# Altium PCB top board (Конфликтующая копия с компьютера LAPTOP-J390UHDT 2019-03-17 (1)).PcbDoc
Units mm, origin at the board's own origin, x right, y up, seen from the top; angles counter-clockwise.
Board outline 77 x 77 mm, 2 copper layers (Top Layer, Bottom Layer); 54 components, 41 nets, 182 pads, 60 vias.
Unrouted connection lines stored in the file: 36.
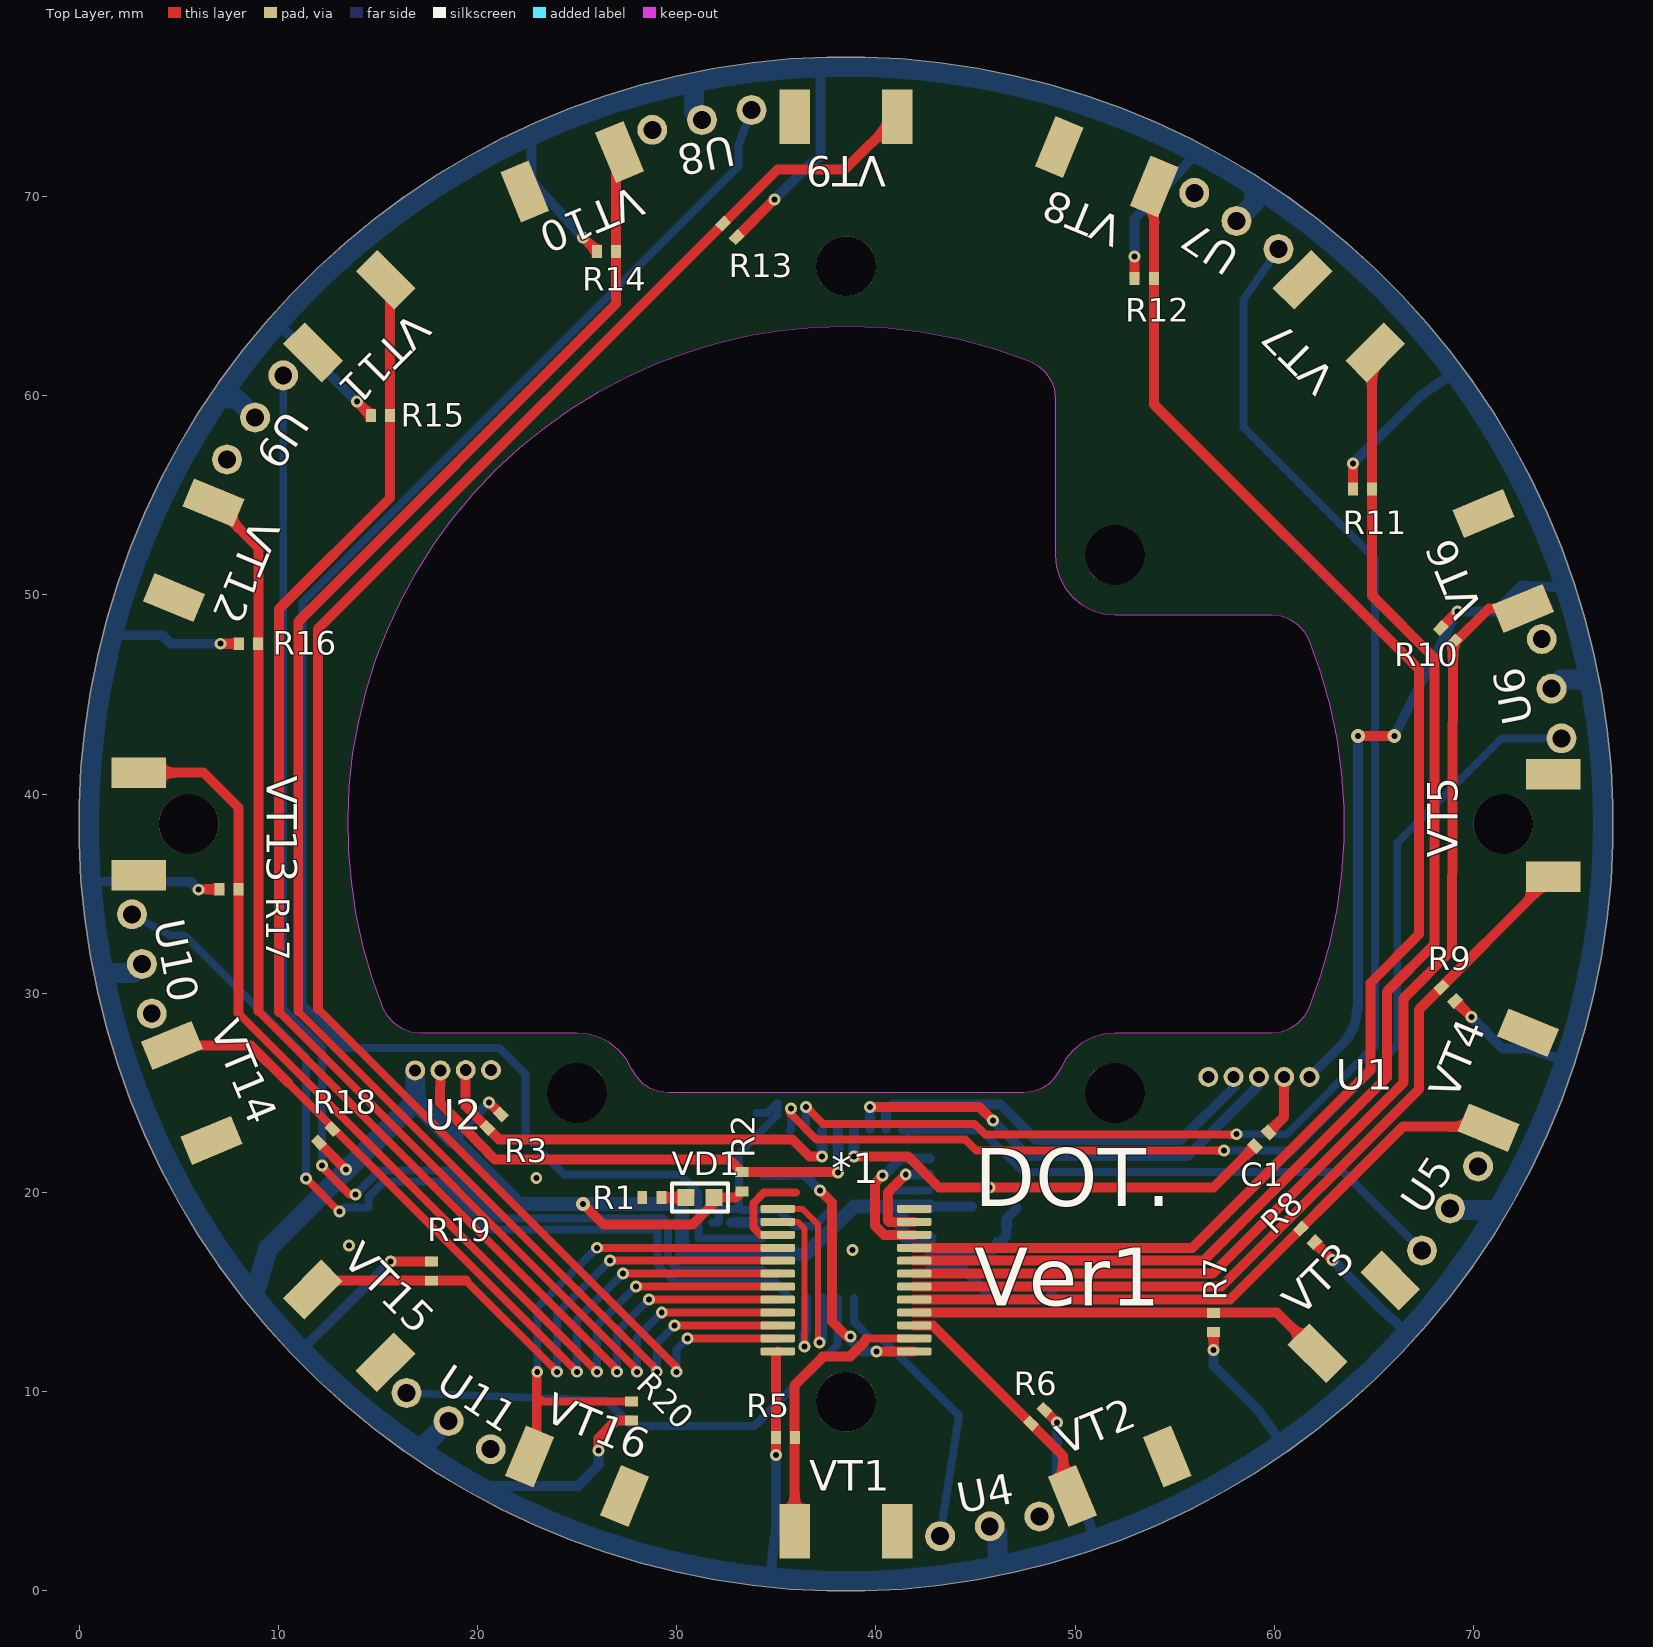
[diagram p0: Top Layer view]
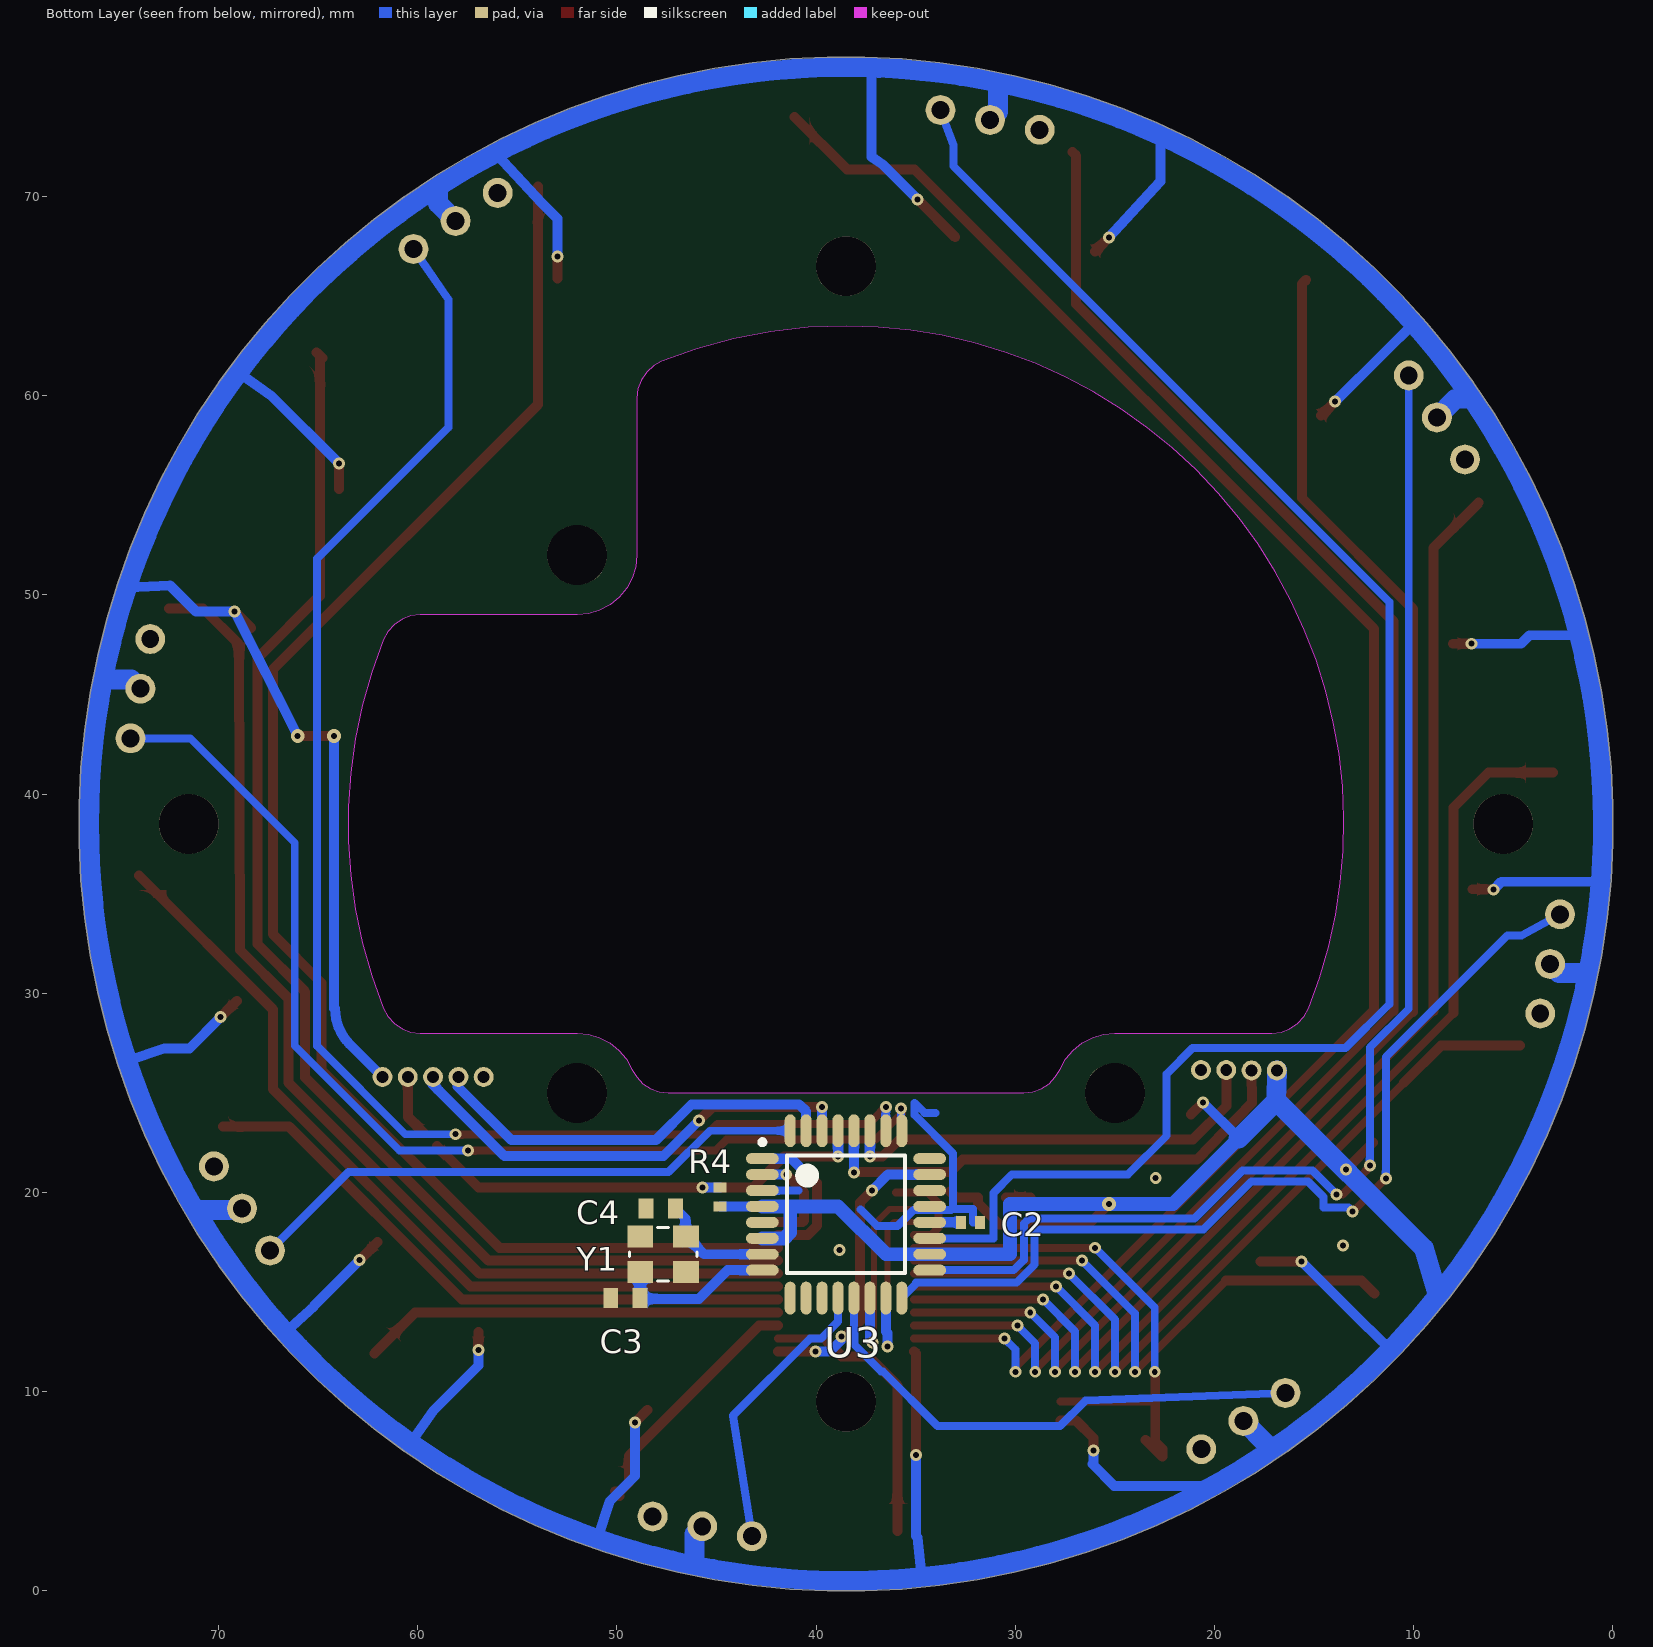
[diagram p1: Bottom Layer view, seen from below]
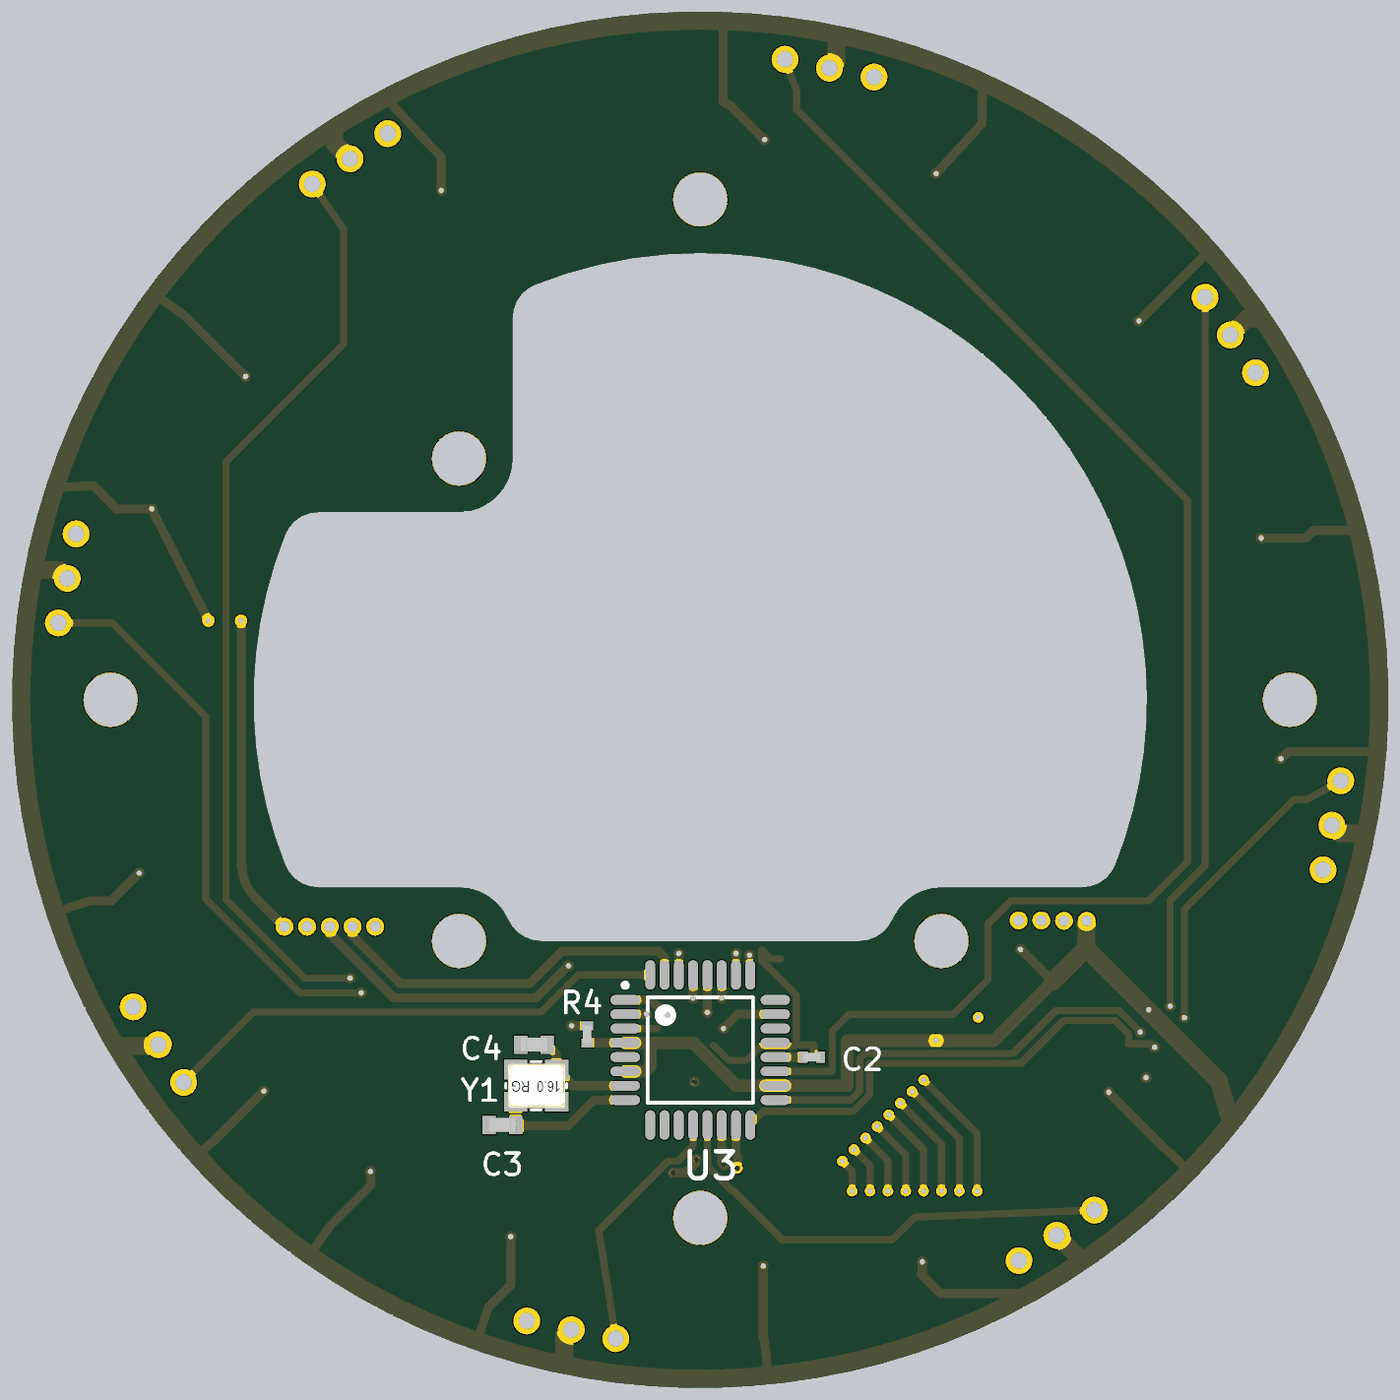
[diagram p2: 3D render of the assembled board from below, using the file's embedded part models]

## Layer stack, top to bottom
Top Solder: solder mask 0.0102, Solder Resist, Dk 3.5
Top Layer: signal copper 0.0356
Dielectric 1: dielectric 0.32, FR-4, Dk 4.8
Bottom Layer: signal copper 0.0356
Bottom Solder: solder mask 0.0102, Solder Resist, Dk 3.5

## Board outline
4.992,19.518 4.101,21.185 3.292,22.894 2.569,24.64 1.932,26.42 1.383,28.228 0.924,30.062 0.555,31.916 0.278,33.786 0.093,35.667 0,37.555 0,39.445 0.093,41.333 0.278,43.214 0.555,45.084 0.924,46.938 1.383,48.772 1.932,50.58 2.569,52.36 3.292,54.106 4.101,55.815 4.992,57.482 5.963,59.104 7.014,60.675 8.14,62.194 9.339,63.655 10.608,65.055 11.945,66.392 13.345,67.661 14.806,68.86 16.325,69.986 17.896,71.037 19.518,72.008 21.185,72.899 22.894,73.708 24.64,74.431 26.42,75.068 28.228,75.617 30.062,76.076 31.916,76.445 33.786,76.722 35.667,76.907 37.555,77 39.445,77 41.333,76.907 43.214,76.722 45.084,76.445 46.938,76.076 48.772,75.617 50.58,75.068 52.36,74.431 54.106,73.708 55.815,72.899 57.482,72.008 59.104,71.037 60.675,69.986 62.194,68.86 63.655,67.661 65.055,66.392 66.392,65.055 67.661,63.655 68.86,62.194 69.986,60.675 71.037,59.104 72.008,57.482 72.899,55.815 73.708,54.106 74.431,52.36 75.068,50.58 75.617,48.772 76.076,46.938 76.445,45.084 76.722,43.214 76.907,41.333 77,39.445 77,37.555 76.907,35.667 76.722,33.786 76.445,31.916 76.076,30.062 75.617,28.228 75.068,26.42 74.431,24.64 73.708,22.894 72.899,21.185 72.008,19.518 71.037,17.896 69.986,16.325 68.86,14.806 67.661,13.345 66.392,11.945 65.055,10.608 63.655,9.339 62.194,8.14 60.675,7.014 59.104,5.963 57.482,4.992 55.815,4.101 54.106,3.292 52.36,2.569 50.58,1.932 48.772,1.383 46.938,0.924 45.084,0.555 43.214,0.278 41.333,0.093 39.445,0 37.555,0 35.667,0.093 33.786,0.278 31.916,0.555 30.062,0.924 28.228,1.383 26.42,1.932 24.64,2.569 22.894,3.292 21.185,4.101 19.518,4.992 17.896,5.963 16.325,7.014 14.806,8.14 13.345,9.339 11.945,10.608 10.608,11.945 9.339,13.345 8.14,14.806 7.014,16.325 5.963,17.896
cut-out: 47.417,25 29.583,25 29.123,25.054 28.688,25.211 28.301,25.465 27.982,25.8 27.75,26.2 27.468,26.706 27.095,27.148 26.643,27.51 26.131,27.779 25.576,27.944 25,28 17.128,28 16.656,28.057 16.21,28.223 15.817,28.49 15.497,28.843 15.27,29.261 14.719,30.789 14.268,32.349 13.92,33.936 13.676,35.541 13.536,37.159 13.502,38.783 13.573,40.406 13.749,42.02 14.03,43.62 14.414,45.198 14.9,46.748 15.485,48.263 16.168,49.737 16.944,51.163 17.812,52.536 18.767,53.85 19.805,55.099 20.923,56.277 22.114,57.381 23.375,58.405 24.699,59.346 26.082,60.198 27.517,60.958 28.998,61.624 30.52,62.192 32.075,62.66 33.657,63.027 35.26,63.289 36.877,63.447 38.5,63.5 40.391,63.428 42.271,63.214 44.129,62.858 45.956,62.362 47.739,61.73 48.157,61.503 48.51,61.183 48.777,60.79 48.943,60.344 49,59.872 49,52 49.058,51.415 49.228,50.852 49.506,50.333 49.879,49.879 50.333,49.506 50.852,49.228 51.415,49.058 52,49 59.872,49 60.344,48.943 60.79,48.777 61.183,48.51 61.503,48.157 61.73,47.739 62.311,46.12 62.778,44.464 63.131,42.78 63.367,41.076 63.485,39.36 63.485,37.64 63.367,35.924 63.131,34.22 62.778,32.536 62.311,30.88 61.73,29.261 61.503,28.843 61.183,28.49 60.79,28.223 60.344,28.057 59.872,28 52,28 51.424,27.944 50.869,27.779 50.357,27.51 49.905,27.148 49.532,26.706 49.25,26.2 49.018,25.8 48.699,25.465 48.312,25.211 47.877,25.054

## Design rules (kind name [scope] priority, off if disabled: settings)
BoardOutlineClearance [All] p1: gap=0.3 ignorepadtopadclearanceinfootprint=FALSE
Clearance Clearance_MultiLayerPad [OnLayer('Multi-Layer') and IsPad] p1: gap=0.25 ignorepadtopadclearanceinfootprint=FALSE except(0: Arc-Hole Track-Hole SMDPad-Hole THPad-Hole Via-Hole Fill-Hole Poly-Hole Region-Hole Text-Hole)
Clearance Clearance_Polygon [InPolygon] p2: gap=0.2 ignorepadtopadclearanceinfootprint=FALSE except(0: Arc-Hole Track-Hole SMDPad-Hole THPad-Hole Via-Hole Fill-Hole Poly-Hole Region-Hole Text-Hole)
Clearance [All] p3: gap=0.15 ignorepadtopadclearanceinfootprint=FALSE except(0: Arc-Hole Track-Hole SMDPad-Hole THPad-Hole Via-Hole Fill-Hole Poly-Hole Region-Hole Text-Hole)
ComponentClearance [All] p1: gap=0 collisioncheckmode=3 verticalgap=0 showdistances=FALSE
HoleToHoleClearance [All] p1: gap=0.2 allowstackedmicrovias=TRUE
MinimumSolderMaskSliver [All] p1: minsoldermaskwidth=0.2
PlaneClearance [All] p1: clearance=0.5
PlaneConnect [All] p1: planeconnectstyle=Relief reliefexpansion=0.5 reliefentries=4 reliefconductorwidth=0.3 reliefairgap=0.2
PolygonConnect PolygonConnect_PadGND [InNet('GND') and IsPad] p1: connectstyle=Relief reliefconductorwidth=0.5 reliefentries=4 polygonreliefangle="90 Angle" airgapwidth=0.2
PolygonConnect PolygonConnect_Via [IsVia] p2: connectstyle=Direct reliefconductorwidth=0.254 reliefentries=4 polygonreliefangle="90 Angle" airgapwidth=0.254
PolygonConnect [All] p3: connectstyle=Relief reliefconductorwidth=0.3 reliefentries=4 polygonreliefangle="90 Angle" airgapwidth=0.2
RoutingVias [All] p1: holewidth=0.3 width=0.7 viastyle="Through Hole" minholewidth=0.2 minwidth=0.4 maxholewidth=1 maxwidth=2
SilkToSolderMaskClearance [IsPad] p1: minsilkscreentomaskgap=0.2 clearancetoexposedcopper=TRUE
SolderMaskExpansion [All] p1: expansion=0.075
Width [All] p1: maxlimit=10 minlimit=0.15 preferedwidth=0.15
24 further rules are at their usual default settings.

## Classes and differential pairs
component class U_Sensors: *1 R5 R6 R7 R8 R9 R10 R11 R12 R13 R14 R15 R16 R17 R18 R19 R20 U4 U5 U6 U7 U8 U9 U10 U11 VT1 VT2 VT3 VT4 VT5 VT6 VT7 VT8 VT9 VT10 VT11 VT12 VT13 VT14 VT15 VT16
component class MK: C1 C2 C3 C4 R1 R2 R3 R4 U1 U2 U3 VD1 Y1

## Components (designator, comment, footprint, x,y, rotation, side; value= is the part's Value field where it differs from the comment)
*1 "Multifleksor" SSOP-24 38.5,15.6 r180 top
C1 "=Value" cap0402 59.375,22.675 r225 top
C2 "=Value" cap0402 32.25,18.5 r0 bottom
C3 "22p" cap0603 49.571,14.7 r0 bottom
C4 "22p" cap0603 47.8,19.2 r0 bottom
R1 "=Value" res0402 28.75,19.75 r180 top
R2 "=Value" res0402 33.275,20.539 r270 top
R3 "=Value" res0402 20.836,23.586 r45 top
R4 "=Value" res0402 44.825,19.775 r270 bottom
R5 "Value" res0402 35.455,7.7 r180 top
R6 "Value" res0402 48.125,8.75 r45 top
R7 "Value" res0402 56.955,13.48 r270 top
R8 "Value" res0402 61.675,17.85 r315 top
R9 "Value" res0402 68.736,29.964 r315 top
R10 "Value" res0402 68.7,48 r135 top
R11 "Value" res0402 64.425,55.325 r180 top
R12 "Value" res0402 53.475,65.875 r180 top
R13 "Value" res0402 32.675,68.3 r315 top
R14 "Value" res0402 26.475,67.25 r180 top
R15 "Value" res0402 15.125,59 r180 top
R16 "Value" res0402 8.505,47.55 r180 top
R17 "Value" res0402 7.525,35.225 r180 top
R18 "Value" res0402 12.375,22.85 r225 top
R19 "Value" res0402 17.7,16.05 r90 top
R20 "Value" res0402 27.725,9.025 r270 top
U1 "Header 5" 5x1.27 59.23,25.8 r0 top
U2 "Header 4" 4x1.27 18.775,26.15 r180 top
U3 "ATmega328P-AUR" 32A_N 38.5,18.9 r180 bottom
U4 "Header 3" 3x2.54 45.716,3.242 r11.25 top
U5 "Header 3" 3x2.54 68.825,19.2 r56.25 top
U6 "Header 3" 3x2.54 73.925,45.292 r101.25 top
U7 "Header 3" 3x2.54 58.1,68.775 r146.25 top
U8 "Header 3" 3x2.54 31.266,73.846 r191.25 top
U9 "Header 3" 3x2.54 8.836,58.912 r236.25 top
U10 "Header 3" 3x2.54 3.15,31.475 r281.25 top
U11 "Header 3" 3x2.54 18.55,8.525 r326.25 top
VD1 "*" CH0603LB 31.171,19.75 r180 top
VT1 "Value" smd2010 38.5,3 r0 top
VT2 "Value" smd2010 52.25,5.75 r22.5 top
VT3 "Value" smd2010 64,13.75 r45 top
VT4 "Value" smd2010 71.75,25.632 r67.5 top
VT5 "Value" smd2010 74,38.425 r90 top
VT6 "Value" smd2010 71.5,51.707 r112.5 top
VT7 "Value" smd2010 63.25,64 r135 top
VT8 "Value" smd2010 51.59,71.5 r157.5 top
VT9 "Value" smd2010 38.5,74 r180 top
VT10 "Value" smd2010 24.75,71.25 r202.5 top
VT11 "Value" smd2010 13.573,64 r225 top
VT12 "Value" smd2010 5.75,52.25 r247.5 top
VT13 "Value" smd2010 3,38.5 r270 top
VT14 "Value" smd2010 5.65,25 r292.5 top
VT15 "Value" smd2010 13.55,13.3 r315 top
VT16 "Value" smd2010 25,5.75 r337.5 top
Y1 "=Value" QSMD3.2x2.5_A 47.681,16.9 r180 bottom

## Footprints (in the part's own frame and the unit in brackets; to place one, negate y for a bottom-side part, rotate by r counter-clockwise, add the part's x,y. Pads: shape width x height; smd on the part's side, far side on the other; paste and mask are expansions set on the pad)
3x2.54 [mm]
  round 1.5 hole 0.9: 1(-2.54,0) 2(0,0) 3(2.54,0)
4x1.27 [mm]
  round 1 hole 0.6: 1(-1.905,0) 2(-0.635,0) 3(0.635,0.02) 4(1.905,0.02)
5x1.27 [mm]
  round 1 hole 0.6: 1(-2.54,0) 2(-1.27,0) 3(0,0) 4(1.27,0) 5(2.54,0)
32A_N [mm] "Thin QFP, 32-Leads, Body 7x7mm, Pitch 0.8mm, IPC Medium Density"
  oval 1.65x0.55 smd: 1(-4.2,2.8) 2(-4.2,2) 3(-4.2,1.2) 4(-4.2,0.4) 5(-4.2,-0.4) 6(-4.2,-1.2) 7(-4.2,-2) 8(-4.2,-2.8) 17(4.2,-2.8) 18(4.2,-2) 19(4.2,-1.2) 20(4.2,-0.4) 21(4.2,0.4) 22(4.2,1.2) 23(4.2,2) 24(4.2,2.8)
  oval 0.55x1.65 smd: 9(-2.8,-4.2) 10(-2,-4.2) 11(-1.2,-4.2) 12(-0.4,-4.2) 13(0.4,-4.2) 14(1.2,-4.2) 15(2,-4.2) 16(2.8,-4.2) 25(2.8,4.2) 26(2,4.2) 27(1.2,4.2) 28(0.4,4.2) 29(-0.4,4.2) 30(-1.2,4.2) 31(-2,4.2) 32(-2.8,4.2)
  silkscreen extent -4.33,-2.95 2.95,3.75, body extent -3.5,-3.5 3.5,3.5, height 1.2
cap0402 [mm]
  rect 0.5x0.65 smd: 1(-0.48,0) 2(0.48,0)
  body extent -0.5,-0.25 0.5,0.25, height 0.49
cap0603 [mm]
  rect 0.75x1.016 smd: 1(-0.74,0) 2(0.74,0)
  body extent -0.8,-0.4 0.8,0.4, height 0.88
CH0603LB [mm] "Chip Capacitor, 2-Leads, Body 1,53x0,85mm, IPC Medium Density"
  rect 0.85x0.85 smd: 1(-0.7,0) 2(0.7,0)
  silkscreen extent -1.4,-0.7 1.4,0.7, body extent -0.8,-0.4 0.8,0.4, height 0.6
QSMD3.2x2.5_A [mm]
  rect 1.3x1.1 smd: 1(-1.15,-0.9) 2(1.15,0.9) ""(-1.15,0.9) ""(1.15,-0.9)
  silkscreen extent -1.7,-1.35 1.7,1.35, body extent -1.58,-1.25 1.63,1.25, height 0.81
res0402 [mm]
  rect 0.5x0.65 smd: 1(-0.48,0) 2(0.48,0)
  body extent -0.5,-0.25 0.5,0.25, height 0.34
smd2010 [mm]
  rect 1.524x2.74 smd: 1(-2.579,0) 2(2.579,0)
SSOP-24 [mm]
  rrect50% 1.75x0.4 smd: 1(-3.425,3.575) 2(-3.425,2.925) 3(-3.425,2.275) 4(-3.425,1.625) 5(-3.425,0.975) 6(-3.425,0.325) 7(-3.425,-0.325) 8(-3.425,-0.975) 9(-3.425,-1.625) 10(-3.425,-2.275) 11(-3.425,-2.925) 12(-3.425,-3.575) 13(3.425,-3.575) 14(3.425,-2.925) 15(3.425,-2.275) 16(3.425,-1.625) 17(3.425,-0.975) 18(3.425,-0.325) 19(3.425,0.325) 20(3.425,0.975) 21(3.425,1.625) 22(3.425,2.275) 23(3.425,2.925) 24(3.425,3.575)
  body extent -3.81,-4 3.79,4, height 1.25

## Part data
C1 C2 C3 C4: library part "Cap SMD"
R1 R2 R3 R4 R5 R6 R7 R8 R9 R10 R11 R12 R13 R14 R15 R16 R17 R18 R19 R20: library part "Resistor SMD"
U3: "8-bit AVR Microcontroller, 32KB Flash, 1KB EEPROM, 2KB SRAM, 32-pin TQFP, Industrial Grade (-40°C to 85°C)", Supplier Part Number 1=ATMEGA328P-AUR-ND, Code_JEDEC=MS-026-ABA, ComponentLink1Description="Manufacturer Link", ComponentLink1URL=http://www.atmel.com/products/avr/default.asp?, ComponentLink2Description="ATmega48A/48PA/88A/88PA/168A/168PA/328/328P Datasheet", ComponentLink2URL=http://www.atmel.com/dyn/resources/prod_documents/8271.pdf, ComponentLink3Description="ATmega48A/48PA/88A/88PA/168A/168PA/328/328P Summary", ComponentLink3URL=http://www.atmel.com/dyn/resources/prod_documents/8271S.pdf, ComponentLink4Description="Atmel.com Home", ComponentLink4URL=http://www.atmel.com, DatasheetVersion="revA, Jan-2010", PackageDescription="32-Lead, 7x7x1.0 mm Body, 0.8mm Lead Pitch, Thin Profile Plastic Quad Flat Package (TQFP)", PackageReference=32A, PackageVersion="revB, Oct-2001", Published=1-Apr-2010, Publisher="Altium Limited", Supplier 1=Digi-Key, Supplier 2=Mouser, Supplier Part Number 2=556-ATMEGA328P-AUR
VD1: library part LED
VT1 VT2 VT3 VT4 VT5 VT6 VT7 VT8 VT9 VT10 VT11 VT12 VT13 VT14 VT15 VT16: library part Phototransistor
Y1: library part Quartz

## Free pads (board coordinates)
  round 3 hole 3: 1(5.5,38.5) 1(25,25) 1(38.5,9.5) 1(38.5,66.5) 1(52,25) 1(52,52) 1(71.5,38.5)

## Via types
v1: diameter 0.6, hole 0.3, Top Layer to Bottom Layer, 57 vias
v2: diameter 0.7, hole 0.3, Top Layer to Bottom Layer, 3 vias

## Nets (pads, with @x,y where several pads share a name; then routed paths per layer and width w, separated by ;. In a path a pad name is that pad's centre, name@x,y a point inside that pad or via, vN(x,y) a via of type N, cw(c..) or ccw(c..) an arc to the next point about the centre after c; other vN are vias at no path point)
1S: *1.2 R5.1 VT1.1 | length 14.4
  Top Layer w0.4: 39.512,12.637 39.55,12.675 *1.2
  Top Layer w0.5: VT1.1 35.921,10.321 37.375,11.775 ; 37.325,11.775 37.375,11.775 ; 39.512,12.637 39.427,12.552 39.427,12.486 38.716,11.775 37.375,11.775
2S: *1.3 R6.1 VT2.1 | length 12.7
  Top Layer w0.5: *1.3 42.857,13.325 49.4,6.782 49.4,5.45 49.848,5.002 50.106,5.002 VT2.1
3S: *1.4 R7.1 VT3.1 | length 21.1
  Top Layer w0.5: *1.4 60.128,13.975 VT3.1
4S: *1.5 R8.1 VT4.1 | length 31.5
  Top Layer w0.5: *1.5 57.775,14.625 66.453,23.303 VT4.1@69.788,23.303
5S: *1.6 R9.1 VT5.1 | length 43
  Top Layer w0.5: *1.6 57.35,15.275 67.275,25.2 67.275,29.196 VT5.1@74,35.921
6S: *1.7 R10.1 VT6.1 | length 55.8
  Top Layer w0.5: *1.7 56.9,15.925 66.5,25.525 66.5,29.75 68.925,32.175 68.975,47.431 68.975,47.523 70.777,49.325 VT6.1
7S: *1.8 R11.1 VT7.1 | length 66.5
  Top Layer w0.5: *1.8 56.45,16.575 65.65,25.775 65.65,30.075 68.05,32.475 68.05,46.825 64.917,49.958 64.917,61.892 64.789,61.892 VT7.1
8S: *1.9 R12.1 VT8.1 | length 77.5
  Top Layer w0.5: *1.9 55.9,17.225 64.825,26.15 64.825,30.525 67.275,32.975 67.275,46.25 53.973,59.552 VT8.1
9S: *1.23 R13.1 VT9.1 | length 90.9
  Top Layer w0.4: 12,29.219 30,11.219 v1(30,11) ; v1(30.55,12.675) *1.23
  Top Layer w0.5: 12,29.219 12,48.3 35.06,71.36 38.439,71.36 VT9.1
  Bottom Layer w0.4: v1(30,11) 30,12.125 v1(30.55,12.675)
10S: *1.22 R14.1 VT10.1 | length 83.2
  Top Layer w0.4: 11,29.1 29,11.1 v1(29,11) ; v1(29.9,13.325) *1.22
  Top Layer w0.5: 11,29.1 11,48.657 26.943,64.6 26.943,72.048 VT10.1
  Bottom Layer w0.4: v1(29,11) 29,12.425 v1(29.9,13.325)
11S: *1.21 R15.1 VT11.1 | length 74
  Top Layer w0.4: 10.043,29.057 28,11.1 v1(28,11) ; v1(29.25,13.975) *1.21
  Top Layer w0.5: 10.043,29.057 10.043,49.304 15.6,54.861 15.6,65.62 VT11.1
  Bottom Layer w0.4: v1(28,11) 28,12.725 v1(29.25,13.975)
12S: *1.20 R16.1 VT12.1 | length 62.8
  Top Layer w0.4: 9,29.1 27,11.1 v1(27,11) ; v1(28.6,14.625) *1.20
  Top Layer w0.5: VT12.1 9,52.37 9,29.1
  Bottom Layer w0.4: v1(27,11) 27,13.025 v1(28.6,14.625)
13S: *1.19 R17.1 VT13.1 | length 53.7
  Top Layer w0.4: 8,29 v1(26,11) ; v1(27.95,15.275) *1.19
  Top Layer w0.5: VT13.1 6.25,41.079 8,39.329 8,29
  Bottom Layer w0.4: v1(26,11) 26,13.325 v1(27.95,15.275)
14S: *1.18 R18.1 VT14.1 | length 40.8
  Top Layer w0.4: 10.485,25.515 v1(25,11) ; v1(27.3,15.925) *1.18
  Top Layer w0.5: VT14.1 8.617,27.383 10.485,25.515
  Bottom Layer w0.4: v1(25,11) 25,13.625 v1(27.3,15.925)
15S: *1.17 R19.1 VT15.1 | length 29.3
  Top Layer w0.4: 19.426,15.574 v1(24,11) ; v1(26.65,16.575) *1.17
  Top Layer w0.5: VT15.1@11.976,14.924 12.626,15.574 19.426,15.574
  Bottom Layer w0.4: v1(24,11) 24,13.925 v1(26.65,16.575)
16S: *1.16 R20.1 VT16.1 | length 27
  Top Layer w0.4: 22.975,9.8 23.27,9.505 R20.1 ; v1(26,17.225) *1.16
  Top Layer w0.5: v1@22.975,11 22.975,9.8 22.975,7.475 22.617,7.117 VT16.1 VT16.1@23.465,7.585
  Bottom Layer w0.4: v1(23,11) 23,14.225 v1(26,17.225)
+5: *1.24 R2.2 R3.2 R4.2 R5.2 R6.2 R7.2 R8.2 R9.2 R10.2 R11.2 R12.2 R13.2 R14.2 R15.2 R16.2 R17.2 R18.2 R19.2 R20.2 U1.5 U2.4 U3.4 U3.6 U3.18 U4.2 U5.2 U6.2 U7.2 U8.2 U9.2 U10.2 U11.2 VD1.1 | length 462.4
  Top Layer w0.5: v1(6,35.2) 6.025,35.225 R17.2 ; v1(7.104,47.55) R16.2 ; R18.2 v1(13.4,21.146) ; v1(13.945,59.7) R15.2 ; v1(15.63,16.53) R19.2 ; v1(20.575,24.525) R3.2 ; v2(25.3,19.426) 26.326,18.4 30.8,18.4 31.871,19.471 VD1.1 32.966,19.75 R2.2 ; v1(25.3,67.945) R14.2 ; v1(26.075,7.05) 26.075,7.675 26.945,8.545 R20.2 ; R13.2 v1(34.9,69.846) v1@34.907,69.846 ; v1(34.975,6.812) R5.2 34.975,11.925 *1.24 ; R6.2 v1(49.1,8.454) ; R12.2 v1(52.995,66.995) ; v1(56.955,12.1) R7.2 ; R8.2 v1(62.925,16.6) ; R11.2 v1(63.945,56.591) ; v2(64.2,42.925) v2(66.025,42.925) ; R10.2 v1(69.2,49.179) ; R9.2 v1(69.9,28.8)
  Bottom Layer w0.5: 0.575,35.6 0.611,35.6 5.6,35.6 v1(6,35.2) ; 1.675,47.975 1.7,47.975 4.188,47.975 4.613,47.55 v1(7.104,47.55) ; 10.012,63.609 11.494,62.151 v1(13.945,59.7) ; 11.19,12.14 12.598,13.498 v1(15.63,16.53) ; 16.9,24.601 16.976,24.525 ; 18.801,22.7 18.801,22.751 v1(20.575,24.525) ; 20.268,5.275 25.041,5.275 26.129,6.363 26.075,6.417 v1(26.075,7.05) ; 22.714,72.93 22.721,70.749 v1(25.3,67.945) ; 34.708,0.786 34.908,2.68 34.975,2.747 v1(34.975,6.812) ; v1(34.9,69.846) 36.675,71.621 37.225,71.992 37.225,76.475 ; U3.4 R4.2@44.825,19.3 ; v1(49.1,8.454) 49.1,5.762 50.354,4.508 50.971,2.661 ; v1(52.995,66.995) 52.995,68.895 53.75,69.65 56.055,72.146 ; v1(56.955,12.1) 56.955,11.311 59.212,9.055 60.34,7.451 ; U1.5 63.406,27.436 ccw(c61.61,29.232) 64.15,29.232 ; v1(62.925,16.6) 65.174,14.351 65.174,14.324 66.619,13.015 ; v1(63.945,56.591) 67.342,59.988 68.94,61.134 ; 64.2,29.232 v2(64.2,42.925) ; v2(66.025,42.925) v1(69.2,49.179) 71.145,49.179 72.448,50.482 74.557,50.37 ; v1(69.9,28.8) 71.465,27.235 72.692,27.235 74.555,26.622
  Bottom Layer w0.7: 18.801,22.7 22.076,19.425 30.275,19.425 30.275,16.9 U3.18 36.5,16.9 38.9,19.3 41.3,19.3 ; U3.6 41.6,17.7 41.3,18 41.3,19.3 ; U3.4 41.3,19.3
  Bottom Layer w1: 1.4,31.025 2.7,31.025 U10.2 ; 7.175,59.85 7.898,59.85 U9.2 ; 8.887,15.156 9.488,17.185 9.488,17.19 16.9,24.601 U2.4 ; 16.976,24.525 18.801,22.7 ; 17.375,7.125 17.375,7.35 U11.2 ; 30.875,75.525 30.875,74.237 U8.2 ; U4.2 46.1,2.858 46.1,1.3 ; U7.2 58.975,69.65 58.975,70.15 ; U5.2 68.9,19.125 71,19.125 ; U6.2 74.383,45.75 75.525,45.75 ; 0.611,35.6 cw(c38.5,38.5) 0.642,41.778 cw(c38.5,38.5) 1.7,47.975 cw(c38.5,38.5) 1.936,48.847 cw(c38.5,38.5) 6.018,58.221 cw(c38.5,38.5) 9.994,63.628 cw(c38.5,38.5) 21.844,72.655 cw(c38.5,38.5) 29.819,75.495 cw(c38.5,38.5) 34.698,76.309 cw(c38.5,38.5) 58.376,70.887 cw(c38.5,38.5) 68.988,61.182 cw(c38.5,38.5) 74.334,51.147 cw(c38.5,38.5) 75.58,46.813 cw(c38.5,38.5) 76.5,38.5 cw(c38.5,38.5) 74.592,26.61 cw(c38.5,38.5) 70.737,18.381 cw(c38.5,38.5) 66.656,12.98 cw(c38.5,38.5) 60.362,7.419 cw(c38.5,38.5) 51.013,2.619 cw(c38.5,38.5) 47.245,1.52 cw(c38.5,38.5) 34.708,0.69 cw(c38.5,38.5) 24.169,3.306 cw(c38.5,38.5) 20.248,5.17 cw(c38.5,38.5) 18.617,6.117 cw(c38.5,38.5) 11.159,12.109 cw(c38.5,38.5) 7.877,16.001 cw(c38.5,38.5) 1.611,29.377 cw(c38.5,38.5) 0.677,34.834 cw(c38.5,38.5) 0.611,35.6
A1: *1.11 U3.2 | length 5.2
  Top Layer w0.5: v1(41.5,20.9) 40.6,20 40.6,18.6 40.675,18.525 *1.11
  Bottom Layer w0.5: v1(41.5,20.9) U3.2
A2: *1.10 U3.1 | length 7.6
  Top Layer w0.5: v1(40.325,20.85) 39.95,20.475 39.95,18.331 40.406,17.875 *1.10
  Bottom Layer w0.5: v1(40.325,20.85) 40.4,20.85 41.25,21.7 U3.1
A3: *1.14 U3.15 | length 9.9
  Top Layer w0.3: *1.14 36.075,18.525 36.425,18.175 v1(36.425,12.275)
  Bottom Layer w0.5: v1(36.425,12.275) 36.425,12.949 36.5,13.024 ; U3.15 36.5,13.024 ; 36.502,13.051 36.502,13.026 36.5,13.024
A4: *1.13 U3.14 | length 10.6
  Top Layer w0.3: *1.13 36.304,19.175 37.1,18.379 37.1,12.55 37.174,12.476 v1(37.177,12.476)
  Bottom Layer w0.5: v1(37.177,12.476) 37.3,12.599 U3.14
AREF: C2.2 U3.20 | length 1.6
  Bottom Layer w0.5: C2.2 U3.20
GND: *1.12 *1.15 C2.1 C3.2 C4.2 R1.2 U1.1 U2.1 U3.3 U3.5 U3.21 U4.3 U5.3 U6.3 U7.3 U8.3 U9.3 U10.3 U11.3 VT1.2 VT2.2 VT3.2 VT4.2 VT5.2 VT6.2 VT7.2 VT8.2 VT9.2 VT10.2 VT11.2 VT12.2 VT13.2 VT14.2 VT15.2 VT16.2 | length 21.6
  Top Layer w0.4: *1.15 34.214,17.875 33.85,18.239 33.85,19.461 34.389,20 36,20
  Bottom Layer w0.4: C2.1 32.13,18.5 32.13,19.175 33.19,19.175 33.24,19.125 33.253,19.125 ; 34,24 34.55,24 35.05,24.5 35.05,23.884 33.125,21.959 33.125,19.253 33.253,19.125 ; 37.768,19.157 36.935,18.325 35.909,18.325 35.109,19.125 33.253,19.125 ; 40.875,20.1 U3.3
  other v1: 38.825,17.11 13.55,17.35 22.95,20.725
I/O: *1.1 U3.23 | length 14.9
  Top Layer w0.5: v1(37.2,20.1) 37.8,19.5 37.8,13.525 38.549,12.776 v1(38.727,12.776) ; v1(40.025,12.025) *1.1
  Bottom Layer w0.5: U3.23 36.4,20.9 v1(37.2,20.1) ; v1(38.727,12.776) 38.727,12.598 39.3,12.025 v1(40.025,12.025)
NetC1_1: C1.1 U1.4 | length 3.1
  Top Layer w0.5: C1.1 60.5,23.8 U1.4
NetC3_1: C3.1 U3.8 Y1.1 | length 8
  Bottom Layer w0.5: U3.8 44.45,16.1 45.887,14.663 48.794,14.663 C3.1 Y1.1
NetC4_1: C4.1 U3.7 Y1.2 | length 5.8
  Bottom Layer w0.5: U3.7 45.631,16.9 Y1.2 46.56,17.829 46.56,18.7 C4.1
NetR1_1: R1.1 VD1.2 | length 1.2
  Top Layer w0.5: R1.1 VD1.2
RESET: C1.2 R4.1 U3.29 | length 23.8
  Top Layer w0.5: v1(38.9,21.8) 41.625,21.8 43.175,20.25 v1(45.7,20.25) 56.955,20.25 C1.2@59.038,22.333
  Bottom Layer w0.5: v1(38.9,21.8) U3.29 ; R4.1@44.83,20.25 v1(45.7,20.25)
RX: U1.3 U3.30 | length 23.6
  Top Layer w0.5: v1(39.702,24.301) 45.184,24.301 v1(45.875,23.61)
  Bottom Layer w0.5: U3.30@39.7,23.2 39.702,23.202 v1(39.702,24.301) ; v1@45.86,23.625 v1(45.875,23.61) 47.66,21.825 55.655,21.825 59.25,25.42 U1.3@59.25,25.8
SCL: R2.1 U2.3 U3.28 | length 25.2
  Top Layer w0.5: U2.3@18.15,26.15 18.15,26.13 18.123,24.49 20.872,21.649 32.646,21.649 R2.1 38.081,21.019 v1(38.1,21)
  Bottom Layer w0.5: v1(38.1,21) U3.28
SDA: R3.1 U2.2 U3.27 | length 22.1
  Top Layer w0.5: U2.2@19.4,26.15 19.4,24.35 21.088,22.662 35.813,22.662 36.675,21.8 v1(37.3,21.8)
  Bottom Layer w0.5: v1(37.3,21.8) U3.27
T1: U3.12 U4.1 | length 14.5
  Bottom Layer w0.4: U3.12 38.9,13.522 39.747,12.675 40.3,12.675 44.175,8.8 U4.1
T2: U3.32 U5.1 | length 28.7
  Bottom Layer w0.4: U3.32 45.33,23.1 47.405,21.025 63.477,21.025 67.215,17.287 U5.1@67.613,17.287
T3: U3.25 U6.1 | length 55.4
  Top Layer w0.4: v1(35.75,24.207) 35.75,24.025 35.7,23.975 37.025,22.65 44.5,22.65 45.05,22.1 v1(57.475,22.1)
  Bottom Layer w0.4: U3.25 35.75,23.15 v1(35.75,24.207) ; v1(57.475,22.1) 60.905,22.1 66.175,27.37 66.175,37.555 71.421,42.801 U6.1
T4: U3.26 U7.1 | length 75.5
  Top Layer w0.4: v1(36.5,24.3) 37.35,23.45 44.95,23.45 45.5,22.9 v1@58.1,22.9
  Bottom Layer w0.4: U3.26 v1(36.5,24.3) ; v1(58.1,22.925) 60.625,22.925 65.05,27.35 65.05,51.825 58.464,58.411 58.464,64.841 U7.1
T5: U3.19 U8.1 | length 85.2
  Bottom Layer w0.4: U8.1 33.1,72.55 33.1,71.525 11.225,49.65 11.225,29.45 13.425,27.25 21.1,27.25 22.4,25.95 22.4,22.85 24.35,20.9 30.175,20.9 31.1,19.975 31.1,17.7 U3.19
T6: U3.17 U9.1 | length 66.9
  Top Layer w0.4: v1(12.201,21.351) 12.201,21.274 13.575,19.9 v1(13.875,19.9)
  Bottom Layer w0.4: U9.1 10.247,58.317 10.247,29.228 12.201,27.274 v1(12.201,21.351) ; v1(13.875,19.9) 15.075,21.1 18.6,21.1 21,18.7 29.311,18.7 29.575,18.436 29.575,16.61 30.085,16.1 U3.17
T7: U3.16 U10.1 | length 47
  Top Layer w0.4: v1(11.4,20.7) v1@13.063,19.037
  Bottom Layer w0.4: U10.1 4.581,32.901 5.299,32.901 11.4,26.8 v1(11.4,20.7) ; v1(13.075,19.05) 13.275,19.25 14.525,19.25 14.525,19.772 15.303,20.55 18.15,20.55 20.55,18.15 29.025,18.15 29.025,16.382 29.932,15.475 34.975,15.475 34.975,15.425 U3.16
T8: U3.13 U11.1 | length 26.3
  Bottom Layer w0.4: U11.1@16.413,9.936 26.475,9.55 27.75,8.275 33.9,8.275 36.65,11.025 36.745,11.025 38.077,12.356 38.077,12.973 38.1,12.95 U3.13
TX: U1.2 U3.31 | length 20.9
  Bottom Layer w0.5: U3.31@40.5,23.2 40.5,24.075 40.85,24.425 46.25,24.425 48.05,22.625 55.3,22.625 58,25.325 U1.2@58,25.8
pads on no net: U3.9 U3.10 U3.11 U3.22 U3.24 Y1.

## Silkscreen, mask and mechanical layers (free items; w line width, h text height)
Top Overlay:
  text "DOT. / Ver1" at 44.95,13.35 h5
Mechanical 3:
  circle w0.254: c38.55,38.525 r35.025
  circle w0.254: c38.5,38.525 r32.529
  lines w0.254: 75.6,38.5 cw(c38.55,38.525) 75.6,38.525
size:
  drawing of 233 lines, arcs and shapes, not listed